# Altium PCB PCB1.PcbDoc
Units mm, origin at the board's own origin, x right, y up, seen from the top; angles counter-clockwise.
Board outline 48.64 x 53.21 mm, 2 copper layers (Top Layer, Bottom Layer); 29 components, 0 nets, 122 pads, 0 vias.
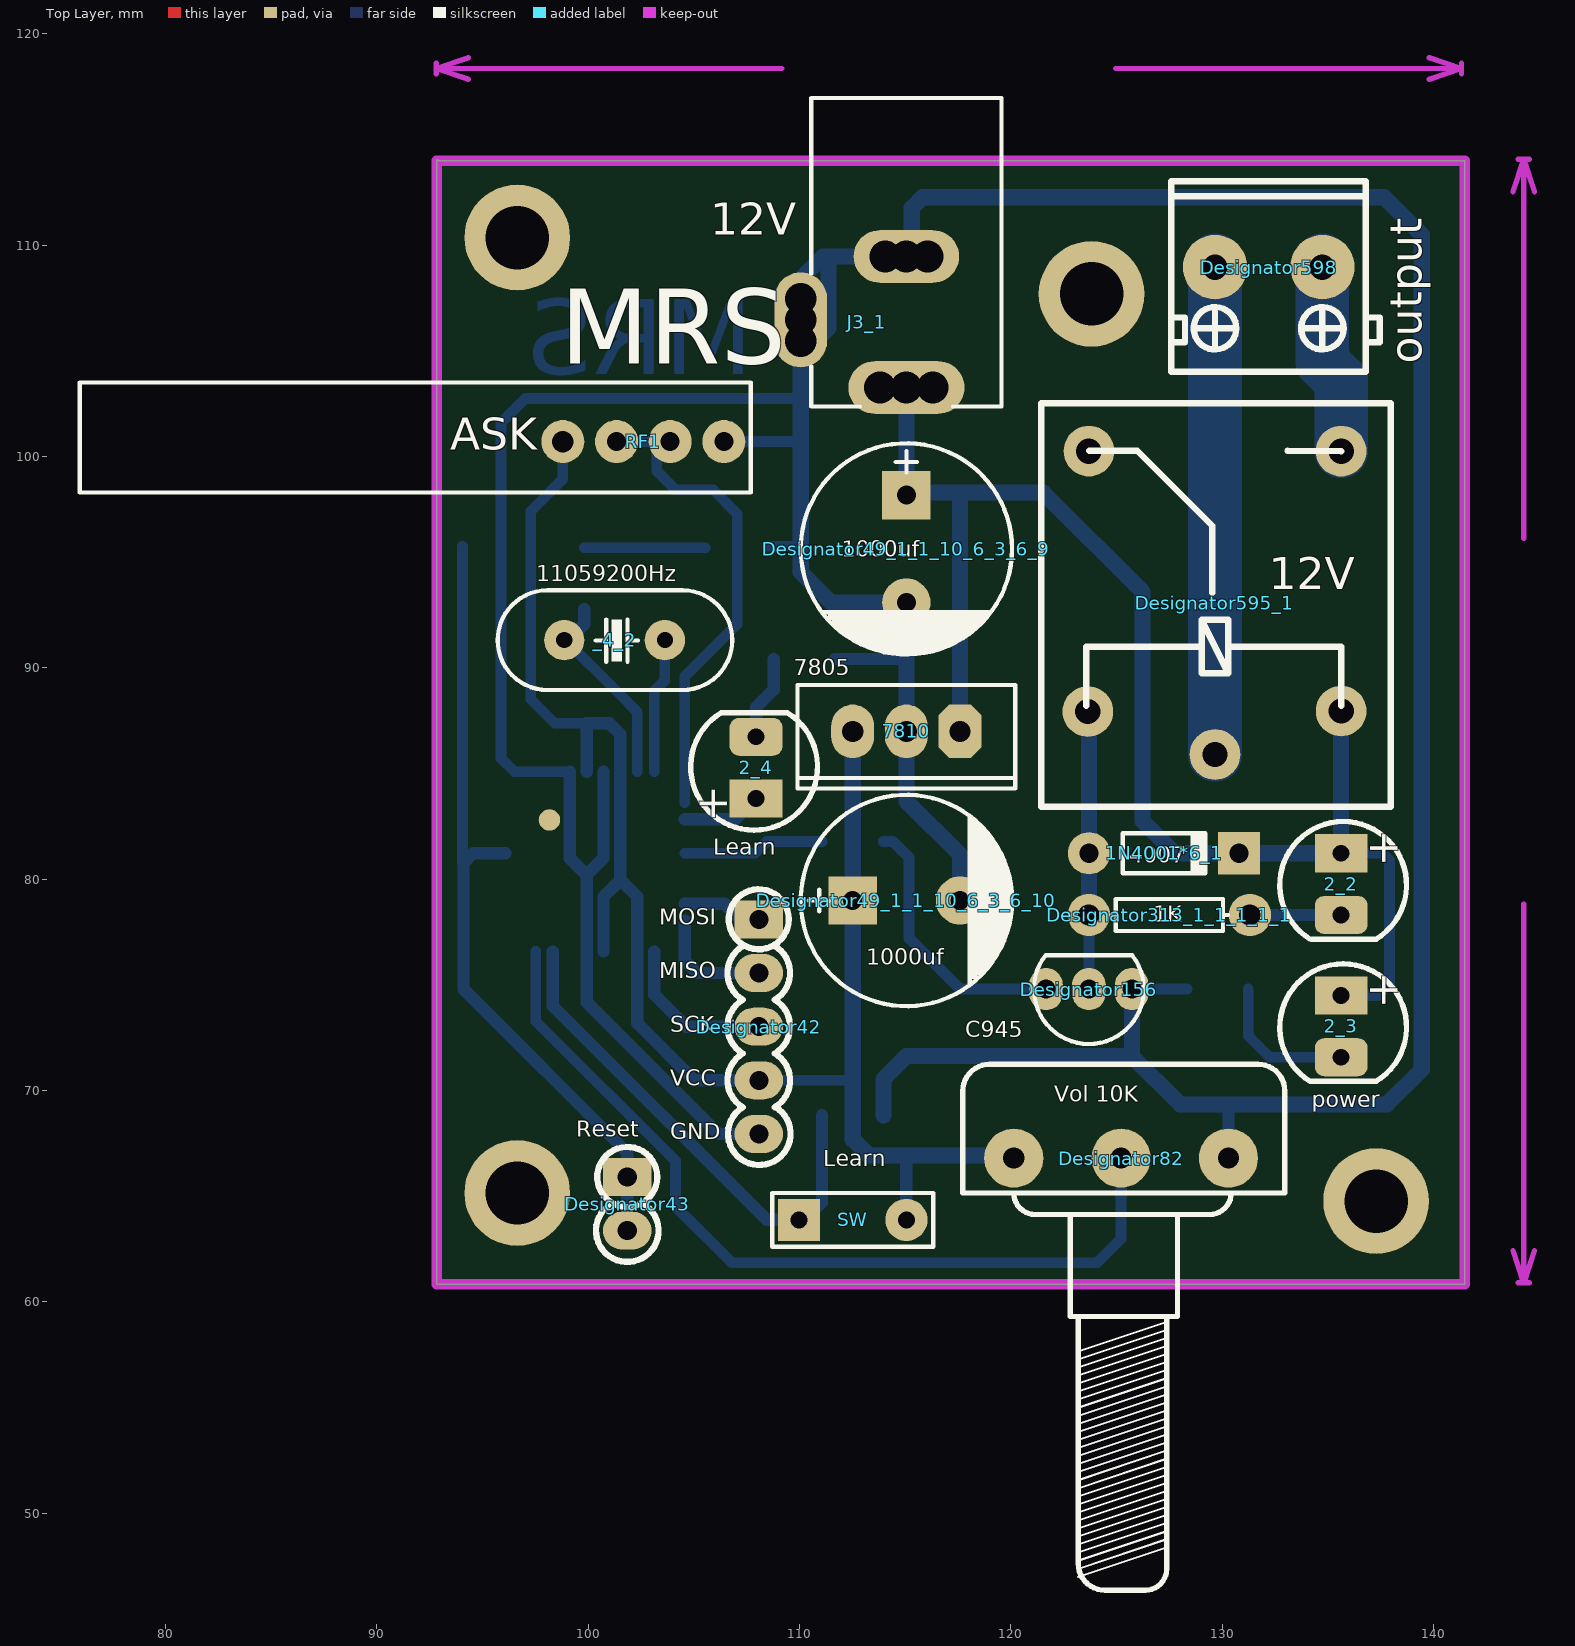
[diagram p0: Top Layer view]
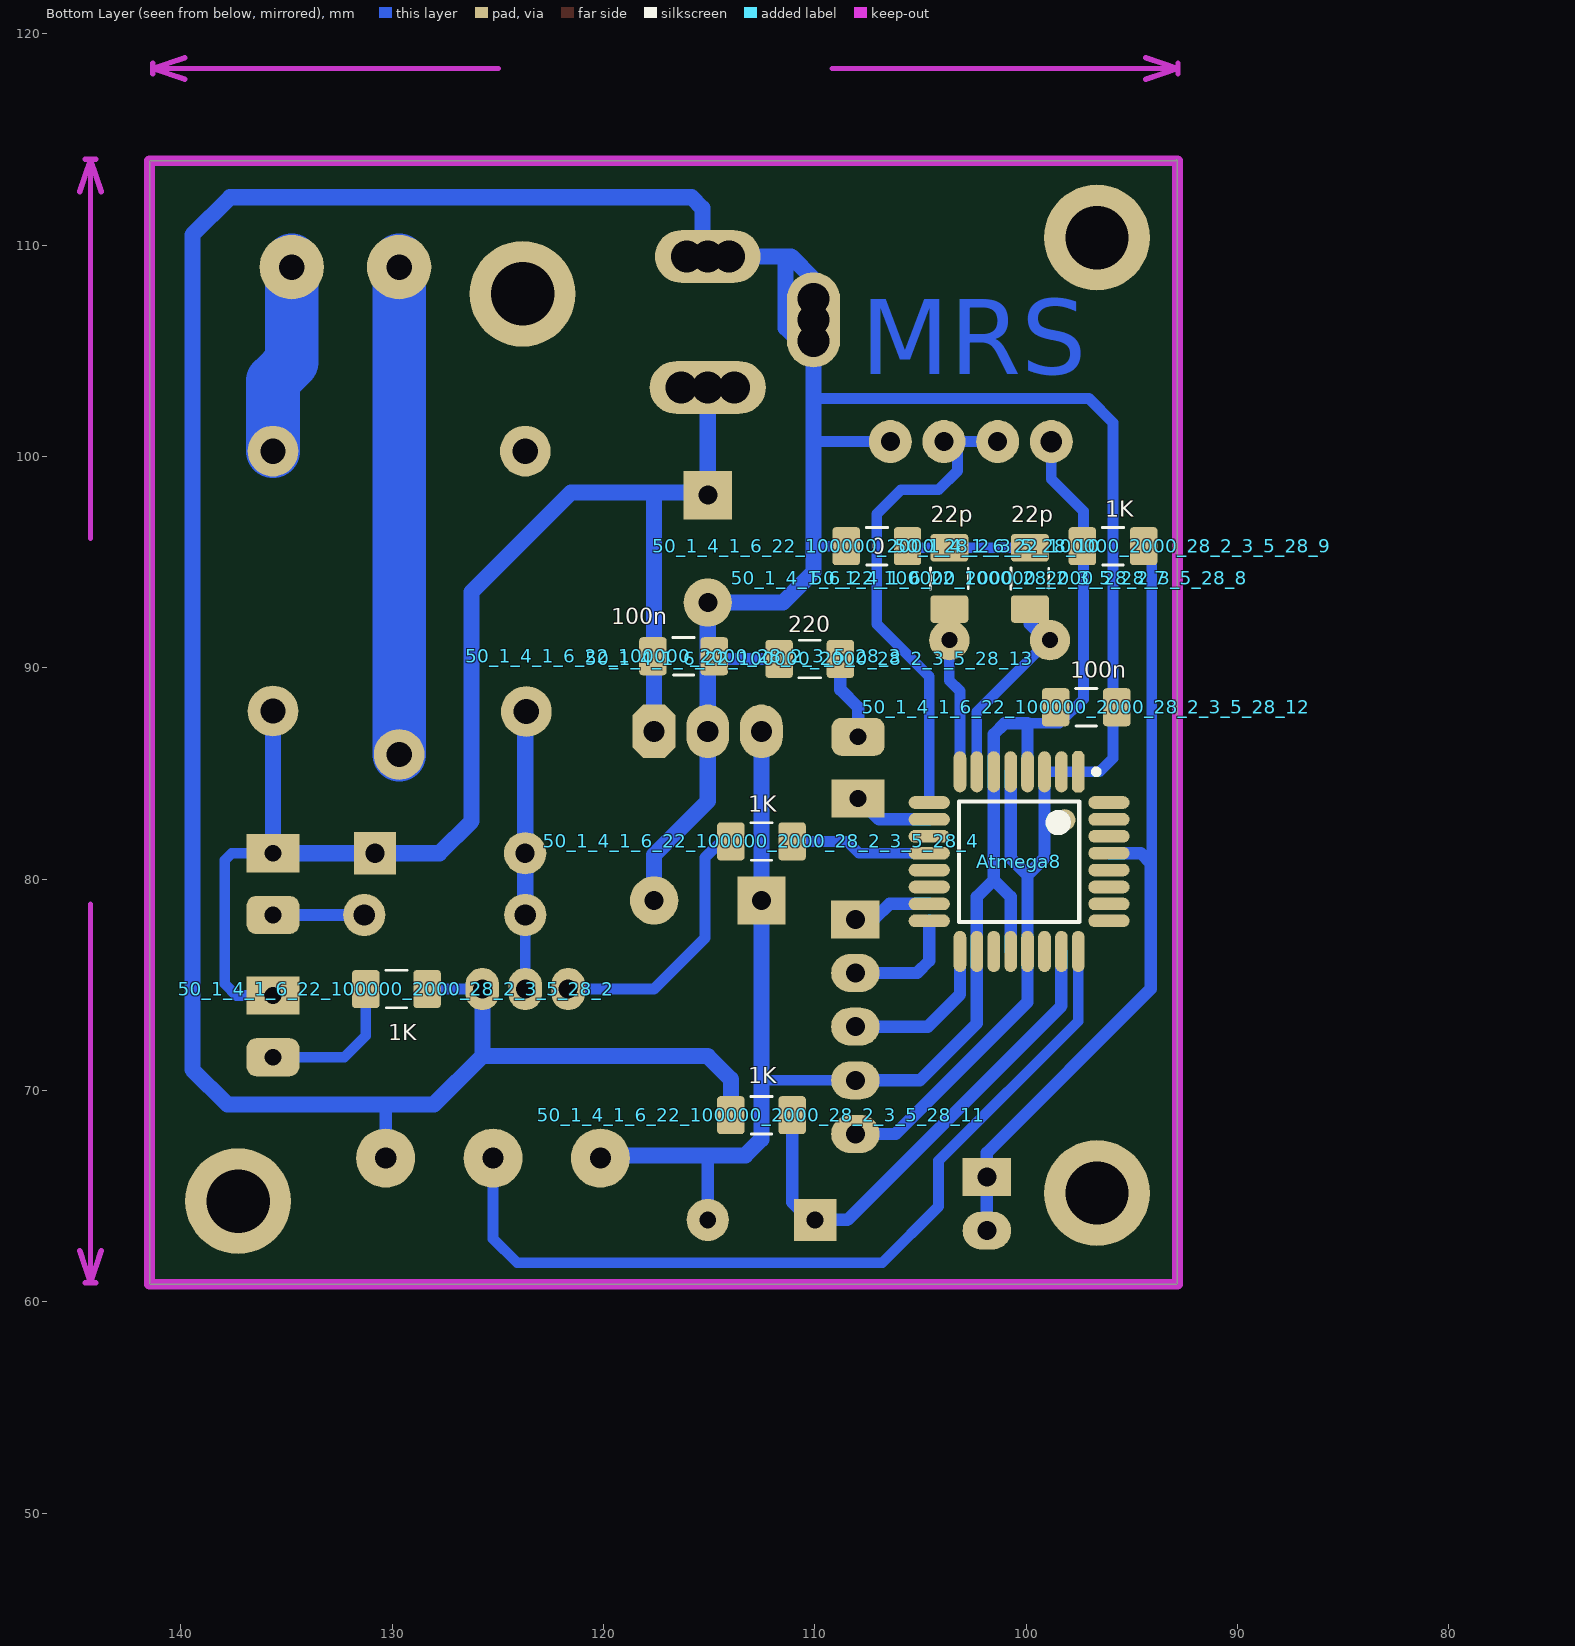
[diagram p1: Bottom Layer view, seen from below]

## Layer stack, top to bottom
Top Layer: signal copper 0.0356
Dielectric: dielectric 0.32, FR-4, Dk 4.8
Bottom Layer: signal copper 0.0356

## Board outline
92.837,113.995 92.888,114.046 92.939,113.995 141.478,113.995 141.478,60.833 92.837,60.833

## Design rules (kind name [scope] priority, off if disabled: settings)
Clearance [All] p1: gap=0.254
ComponentClearance [All] p1: gap=0.254 collisioncheckmode=3 verticalgap=0.254
PolygonConnect [All] p1: connectstyle=Relief reliefconductorwidth=0.254 reliefentries=4 polygonreliefangle="90 Angle"
RoutingVias [All] p1: holewidth=0.711 width=1.27 viastyle="Through Hole" minholewidth=0.711 minwidth=1.27 maxholewidth=0.711 maxwidth=1.27
SolderMaskExpansion [All] p1: expansion=0.102
TestPointUsage [All] p1: valid=0 allowmultiple=FALSE
Testpoint [All] p1: side=15 testpointundercomponent=TRUE minsize=1.016 maxsize=2.54 preferedsize=1.524 minholesize=0 maxholesize=1.016 preferedholesize=0.813 testpointgrid=0.025 style=1023 order=0-112345678
Width [All] p1: maxlimit=0.254 minlimit=0.254 preferedwidth=0.254
18 further rules are at their usual default settings.

## Components (designator, comment, footprint, x,y, rotation, side; value= is the part's Value field where it differs from the comment)
1N4001*6_1 "Comment" DIO7.1-3.9x1.9 127.254,81.229 r0 top
2_2 "Comment" LED-1 135.636,79.832 r0 top
2_3 "Comment" LED-1 135.636,73.101 r0 top
2_4 "Comment" LED-1 107.95,85.217 r180 top
50_1_4_1_6_22_100000_2000_28_2_3_5_28_2 "Comment" RESC3216X70N 129.794,74.803 r0 bottom
50_1_4_1_6_22_100000_2000_28_2_3_5_28_3 "Comment" RESC3216X70N 116.205,90.551 r0 bottom
50_1_4_1_6_22_100000_2000_28_2_3_5_28_4 "Comment" RESC3216X70N 112.522,81.788 r0 bottom
50_1_4_1_6_22_100000_2000_28_2_3_5_28_7 "Comment" RESC3216X70N 103.632,94.234 r270 bottom
50_1_4_1_6_22_100000_2000_28_2_3_5_28_8 "Comment" RESC3216X70N 99.822,94.234 r270 bottom
50_1_4_1_6_22_100000_2000_28_2_3_5_28_9 "Comment" RESC3216X70N 95.885,95.758 r0 bottom
50_1_4_1_6_22_100000_2000_28_2_3_5_28_10 "Comment" RESC3216X70N 107.061,95.758 r0 bottom
50_1_4_1_6_22_100000_2000_28_2_3_5_28_11 "Comment" RESC3216X70N 112.522,68.834 r0 bottom
50_1_4_1_6_22_100000_2000_28_2_3_5_28_12 "Comment" RESC3216X70N 97.155,88.138 r0 bottom
50_1_4_1_6_22_100000_2000_28_2_3_5_28_13 "Comment" RESC3216X70N 110.236,90.424 r180 bottom
7810 "Comment" 221A-04 115.062,86.995 r180 top
_4_2 "Comment" XTAL 103.632,91.313 r180 top
Atmega8 "Comment" My_32A_M 100.33,80.832 r270 bottom
Designator42 "Comment" SIP5 108.077,78.105 r270 top
Designator43 "Comment" SIP2 101.854,65.913 r270 top
Designator49_1_1_10_6_3_6_9 "Comment" "cap 04" 115.062,95.631 r90 top
Designator49_1_1_10_6_3_6_10 "Comment" "cap 04" 115.062,78.994 r180 top
Designator82 "Comment" VOLOM 125.476,66.802 r180 top
Designator156 "Comment" 78LXX 123.698,74.803 r0 top
Designator313_1_1_1_1_1 "Comment" AXIAL-0.3 127.508,78.308 r0 top
Designator595_1 "Comment" RELAY3 135.636,87.96 r180 top
Designator598 "Comment" TER2 134.747,108.966 r0 top
J3_1 "Adaptor jack" KLD-0202 115.062,116.967 r270 top
RF1 "Comment" HDR1X4 98.806,100.711 r0 top
SW "Comment" HDR1X3 109.982,63.881 r0 top

## Footprints (in the part's own frame and the unit in brackets; to place one, negate y for a bottom-side part, rotate by r counter-clockwise, add the part's x,y. Pads: shape width x height; smd on the part's side, far side on the other; paste and mask are expansions set on the pad)
78LXX [mm]
  oval 1.6x2 hole 0.9: B(-2.032,0) C(0,0) E(2.032,0)
  silkscreen extent -2.6,-2.6 2.6,1.6, body extent -2.48,-2.3 2.32,1.63, height 8
221A-04 [mm]
  oct 2.032x2.54 hole 1: 1(-2.54,0)
  oval 2.032x2.54 hole 1: 2(0,0) 3(2.54,0)
  silkscreen extent -5.15,-2.2 5.15,2.7
AXIAL-0.3 [mm]
  round 2 hole 1.016: 1(-3.81,0) 2(3.81,0)
  silkscreen extent -2.77,-0.76 2.77,0.76
"cap 04" [mil]
  rect 90x90 hole 35.43: 1(100,0)
  round 90 hole 35.43: 2(-100,0)
  silkscreen extent -197,-197 197,197, body extent -198,-197 198,199, height 513
DIO7.1-3.9x1.9 [mm]
  round 2 hole 0.9: 1(-3.55,0)
  rect 2x2 hole 0.9: 2(3.55,0)
  silkscreen extent -1.95,-0.95 2.05,0.95
HDR1X3 [mm]
  round 0 all layers, no hole: 2(2.54,0)
  round 2 hole 0.8: +(5.08,0)
  rect 2x2 hole 0.8: -(0,0)
  silkscreen extent -1.27,-1.27 6.35,1.27
HDR1X4 [mil] "Connector; Header; 4 Position"
  round 80 hole 35.43: 2(100,0) -(300,0) ""(200,0)
  round 80 hole 40: +(0,0)
  silkscreen extent -900,-95 350,110
KLD-0202 [mm]
  rect 2.5x2.5 hole 1.5: 1(13.7,0) 2(7.5,0) 3(10.5,-5)
  oval 2.5x3 hole 1.5: 1A(13.7,-1.25) 1B(13.7,1.25) 2A(7.5,-1) 2B(7.5,1)
  round 2.5 hole 1.5: 3A(9.5,-5) 3B(11.5,-5)
  silkscreen extent 0,-4.5 14.6,4.5
LED-1 [mm] "LED; 2 Leads"
  rect 2.5x1.8 hole 0.8: 1(0,1.397)
  rrect50% 2.5x1.8 hole 0.8: 2(0,-1.524)
  silkscreen extent -2.91,-2.67 3.09,2.9
My_32A_M [mm]
  oct 1.95x0.6 smd: 1(-4.25,2.8)
  oval 0.6x1.95 smd: 10(-2,-4.25) 13(0.4,-4.25) 14(1.2,-4.25) 25(2.8,4.25) 26(2,4.25) 27(1.2,4.25) 32(-2.8,4.25) B0(-0.4,-4.25) C5(0.4,4.25) D5(-2.8,-4.25) D7(-1.2,-4.25) MISO(2.8,-4.25) MOSI(2,-4.25) RESET(-0.4,4.25) RX(-1.2,4.25) TX(-2,4.25)
  oval 1.95x0.6 smd: 19(4.25,-1.2) 22(4.25,1.2) 24(4.25,2.8) AREF(4.25,-0.4) AVCC(4.25,-2) B5/SCK(4.25,-2.8) C0(4.25,2) D4(-4.25,2) GND(-4.25,-0.4) GND(-4.25,1.2) GND(4.25,0.4) VCC(-4.25,-1.2) VCC(-4.25,0.4) XTAL(-4.25,-2.8) XTAL(-4.25,-2)
  silkscreen extent -4.37,-2.85 2.85,3.77, body extent -3.5,-3.5 3.5,3.5, height 1.2
RELAY3 [mm]
  round 2.4 hole 1.2: 1(0,0) 2(11.989,0.025) 3(5.969,2.057) 4(11.938,-12.294) 5(0,-12.294)
  silkscreen extent -2.34,-14.55 14.2,4.52
RESC3216X70N [mm] "Chip Resistor, Body 3.2x1.6mm, EIA 1206, IPC Medium Density"
  round 0.508 on Mech15: 0(0,0)
  rrect25% 1.3x1.8 smd: 1(-1.45,0) 2(1.45,0)
  silkscreen extent -0.51,-0.89 0.51,0.89, body extent -1.62,-0.82 1.63,0.83, height 0.69
SIP2 [mm]
  rect 1.8x2.3 hole 0.9: 1(0,0)
  oval 1.8x2.3 hole 0.9: 2(2.54,0)
  silkscreen extent -1.42,-1.48 4.02,1.48
SIP5 [mm]
  rect 1.8x2.3 hole 0.9: 1(0,0)
  oval 1.8x2.3 hole 0.9: 2(2.54,0) 3(5.08,0) 4(7.62,0) 5(10.16,0)
  silkscreen extent -1.42,-1.48 11.62,1.5
TER2 [mil]
  round 120 hole 47.24: 1(0,0) 2(-200,0)
  silkscreen extent -282,-195 107,160
VOLOM [mil]
  round 110 hole 39.37: 0(-190,0) 1(10,0) 2(210,0)
  silkscreen extent -295,-175 305,805
XTAL [mil]
  round 75 hole 30: 1(0,0) 2(187.4,0)
  silkscreen extent -126,-93 311,93, body extent -131,-94 316,95, height 514

## Part data
7810: library part MC7805BT
RF1: library part COAX-M
SW: library part "Header 3"

## Free pads (board coordinates)
  round 5 hole 3: 0(96.647,65.151) 0(96.647,110.363) 0(123.825,107.696) 0(137.287,64.77)
  round 1.016 all layers, no hole: 0(98.171,82.804)

## Nets (pads, with @x,y where several pads share a name; then routed paths per layer and width w, separated by ;. In a path a pad name is that pad's centre, name@x,y a point inside that pad or via, vN(x,y) a via of type N, cw(c..) or ccw(c..) an arc to the next point about the centre after c; other vN are vias at no path point)
pads on no net: 1N4001*6_1.1 1N4001*6_1.2 2_2.1 2_2.2 2_3.1 2_3.2 2_4.1 2_4.2 50_1_4_1_6_22_100000_2000_28_2_3_5_28_2.0 50_1_4_1_6_22_100000_2000_28_2_3_5_28_2.1 50_1_4_1_6_22_100000_2000_28_2_3_5_28_2.2 50_1_4_1_6_22_100000_2000_28_2_3_5_28_3.0 50_1_4_1_6_22_100000_2000_28_2_3_5_28_3.1 50_1_4_1_6_22_100000_2000_28_2_3_5_28_3.2 50_1_4_1_6_22_100000_2000_28_2_3_5_28_4.0 50_1_4_1_6_22_100000_2000_28_2_3_5_28_4.1 50_1_4_1_6_22_100000_2000_28_2_3_5_28_4.2 50_1_4_1_6_22_100000_2000_28_2_3_5_28_7.0 50_1_4_1_6_22_100000_2000_28_2_3_5_28_7.1 50_1_4_1_6_22_100000_2000_28_2_3_5_28_7.2 50_1_4_1_6_22_100000_2000_28_2_3_5_28_8.0 50_1_4_1_6_22_100000_2000_28_2_3_5_28_8.1 50_1_4_1_6_22_100000_2000_28_2_3_5_28_8.2 50_1_4_1_6_22_100000_2000_28_2_3_5_28_9.0 50_1_4_1_6_22_100000_2000_28_2_3_5_28_9.1 50_1_4_1_6_22_100000_2000_28_2_3_5_28_9.2 50_1_4_1_6_22_100000_2000_28_2_3_5_28_10.0 50_1_4_1_6_22_100000_2000_28_2_3_5_28_10.1 50_1_4_1_6_22_100000_2000_28_2_3_5_28_10.2 50_1_4_1_6_22_100000_2000_28_2_3_5_28_11.0 50_1_4_1_6_22_100000_2000_28_2_3_5_28_11.1 50_1_4_1_6_22_100000_2000_28_2_3_5_28_11.2 50_1_4_1_6_22_100000_2000_28_2_3_5_28_12.0 50_1_4_1_6_22_100000_2000_28_2_3_5_28_12.1 50_1_4_1_6_22_100000_2000_28_2_3_5_28_12.2 50_1_4_1_6_22_100000_2000_28_2_3_5_28_13.0 50_1_4_1_6_22_100000_2000_28_2_3_5_28_13.1 50_1_4_1_6_22_100000_2000_28_2_3_5_28_13.2 7810.1 7810.2 7810.3 _4_2.1 _4_2.2 Atmega8.1 Atmega8.10 Atmega8.13 Atmega8.14 Atmega8.19 Atmega8.22 Atmega8.24 Atmega8.25 Atmega8.26 Atmega8.27 Atmega8.32 Atmega8.AREF Atmega8.AVCC Atmega8.B0 Atmega8.B5/SCK Atmega8.C0 Atmega8.C5 Atmega8.D4 Atmega8.D5 Atmega8.D7 Atmega8.GND Atmega8.MISO Atmega8.MOSI Atmega8.RESET Atmega8.RX Atmega8.TX Atmega8.VCC Atmega8.XTAL Designator42.1 Designator42.2 Designator42.3 Designator42.4 Designator42.5 Designator43.1 Designator43.2 Designator49_1_1_10_6_3_6_9.1 Designator49_1_1_10_6_3_6_9.2 Designator49_1_1_10_6_3_6_10.1 Designator49_1_1_10_6_3_6_10.2 Designator82.0 Designator82.1 Designator82.2 Designator156.B Designator156.C Designator156.E Designator313_1_1_1_1_1.1 Designator313_1_1_1_1_1.2 Designator595_1.1 Designator595_1.2 Designator595_1.3 Designator595_1.4 Designator595_1.5 Designator598.1 Designator598.2 J3_1.1 J3_1.1A J3_1.1B J3_1.2 J3_1.2A J3_1.2B J3_1.3 J3_1.3A J3_1.3B RF1. RF1.2 RF1.+ RF1.- SW.2 SW.+ SW.-
copper on no net: | length 617.8
  Bottom Layer w0.508: 94.054,80.772 94.054,95.758 ; 97.53,76.582 97.53,73.285 104.14,66.675 104.14,64.516 106.807,61.849 124.079,61.849 125.222,62.992 125.222,66.802 ; 98.806,100.711 98.806,98.933 97.282,97.409 97.282,88.519 98.425,87.376 100.457,87.376 ; 98.872,91.313 98.933,91.313 101.473,88.773 102.33,87.916 102.33,85.082 ; 99.13,85.082 96.528,85.082 95.885,85.725 95.885,101.6 97.028,102.743 110.062,102.743 ; 99.822,95.684 103.632,95.684 105.537,95.684 ; 101.981,100.711 104.394,100.711 ; 103.13,85.082 103.13,88.906 103.632,89.408 103.632,91.313 ; 103.251,100.711 103.251,99.314 104.14,98.425 105.918,98.425 107.061,97.282 107.061,92.075 104.58,89.594 104.58,83.632 ; 104.58,81.232 107.902,81.232 108.458,81.788 111.072,81.788 ; 107.061,100.711 110.062,100.711 ; 107.442,70.485 112.522,70.485 ; 108.511,95.758 110.062,95.758 ; 113.972,81.788 114.427,81.788 115.189,81.026 115.189,77.216 117.602,74.803 121.666,74.803 ; 123.698,74.803 123.698,78.308 ; 125.73,74.803 128.344,74.803 ; 131.244,74.803 131.244,72.591 132.258,71.577 135.636,71.577 ; 135.636,74.498 137.363,74.498 137.922,75.057 137.922,80.899 137.592,81.229 135.636,81.229
  Bottom Layer w0.584: 96.08,81.232 94.567,81.232 94.107,80.772 94.107,74.803 101.854,67.056 101.854,63.373 ; 98.33,76.582 98.33,74.009 108.458,63.881 110.236,63.881 111.072,64.717 111.072,68.834 ; 99.06,91.313 99.822,92.075 99.822,92.784 ; 99.13,85.082 99.13,80.996 99.93,80.196 ; 99.93,85.082 99.93,87.376 100.457,87.376 101.016,87.376 101.53,86.862 101.53,85.082 101.53,79.971 ; 100.73,76.582 100.73,79.171 101.53,79.971 ; 100.73,85.082 100.73,80.996 99.93,80.196 ; 103.13,76.582 103.13,74.543 104.648,73.025 108.077,73.025 ; 104.58,78.032 104.58,76.141 105.156,75.565 108.077,75.565 ; 104.58,78.832 106.461,78.832 107.188,78.105 108.077,78.105 ; 104.58,82.832 106.962,82.832 107.95,83.82 ; 107.95,86.741 107.95,88.138 108.786,88.974 108.786,90.424 ; 108.077,67.945 106.172,67.945 99.93,74.187 99.93,76.582 99.93,80.196 ; 108.077,70.485 105.029,70.485 102.33,73.184 102.33,76.582 102.33,79.171 101.53,79.971 ; 111.686,90.424 114.755,90.424 ; 115.062,63.881 115.062,66.929 ; 130.302,66.802 130.302,69.342 ; 131.191,78.308 135.636,78.308
  Bottom Layer w0.762: 110.062,104.775 111.379,106.092 111.379,109.467 ; 112.522,78.994 112.522,67.691 113.284,66.929 120.142,66.929 ; 112.522,79.248 112.522,86.995 ; 113.972,68.834 113.972,70.538 115.062,71.628 121.666,71.628 125.73,71.628 ; 115.062,99.314 115.062,98.679 115.062,99.695 ; 115.062,103.267 115.062,99.695 ; 115.062,109.467 111.118,109.467 110.062,108.411 110.062,94.535 111.506,93.091 115.062,93.091 115.062,86.995 115.062,83.693 117.602,81.153 117.602,78.994 ; 115.316,109.474 115.316,111.76 115.824,112.268 137.668,112.268 139.446,110.49 139.446,70.993 137.795,69.342 128.016,69.342 125.73,71.628 ; 117.602,86.995 117.602,98.298 ; 123.698,78.308 123.698,87.884 ; 125.73,74.803 125.73,71.628 ; 135.636,87.96 135.636,81.229 127.762,81.229 126.238,82.753 126.238,93.599 121.539,98.298 115.062,98.298 115.062,99.695
  Bottom Layer w2.54: 129.667,85.903 129.667,109.296 ; 134.747,109.296 134.747,104.47 135.636,103.581 135.636,100.254

## Keep-outs
Keep-Out Layer:
  lines w0.254: 92.814,118.11 92.814,118.618 ; 94.338,117.856 92.814,118.364 ; 94.338,118.872 92.814,118.364 ; 109.174,118.364 92.814,118.364 ; 124.968,118.364 141.328,118.364 ; 139.804,117.856 141.328,118.364 ; 139.804,118.872 141.328,118.364 ; 141.328,118.11 141.328,118.618 ; 143.764,62.423 144.272,60.899 ; 143.764,112.537 144.272,114.061 ; 144.018,60.899 144.526,60.899 ; 144.018,114.061 144.526,114.061 ; 144.272,78.821 144.272,60.899 ; 144.272,96.139 144.272,114.061 ; 144.78,62.423 144.272,60.899 ; 144.78,112.537 144.272,114.061
  lines w0.508: 92.837,60.833 141.478,60.833 141.478,113.995 92.837,113.995 92.837,60.833
  text "48.514 (mm)" at 109.428,117.45 h1.52
  text "53.1622 (mm)" at 145.186,79.075 h1.52 r90

## Other copper
Bottom Layer:
  text "MRS" at 107.823,103.886 h3.56

## Silkscreen, mask and mechanical layers (free items; w line width, h text height)
Top Overlay:
  text "12V" at 105.791,110.49 h1.52
  text "MRS" at 98.679,104.394 h3.56
  text "output" at 139.446,104.394 h1.52 r90
  text "ASK" at 93.472,100.33 h1.52
  text "1000uf" at 112.014,95.25 h0.76
  text "11059200Hz" at 97.536,94.107 h0.76
  text "12V" at 132.207,93.726 h1.52
  text "7805" at 109.728,89.662 h0.76
  text "Learn" at 105.918,81.153 h0.76
  text "4007" at 125.603,80.772 h0.76
  text "1K" at 126.746,77.978 h0.76
  text "MOSI" at 103.378,77.851 h0.76
  text "1000uf" at 113.157,75.946 h0.76
  text "MISO" at 103.378,75.311 h0.76
  text "SCK" at 103.886,72.771 h0.76
  text "C945" at 117.856,72.517 h0.76
  text "VCC" at 103.886,70.231 h0.76
  text "Vol 10K" at 122.047,69.469 h0.76
  text "power" at 134.239,69.215 h0.76
  text "Reset" at 99.441,67.818 h0.76
  text "GND" at 103.886,67.691 h0.76
  text "Learn" at 111.125,66.421 h0.76
Bottom Overlay:
  text "1K" at 96.266,97.155 h0.76
  text "22p" at 100.711,96.901 h0.76
  text "22p" at 104.521,96.901 h0.76
  text "0" at 107.315,95.377 h0.76
  text "100n" at 119.634,92.075 h0.76
  text "220" at 111.252,91.694 h0.76
  text "100n" at 97.917,89.535 h0.76
  text "1K" at 113.157,83.185 h0.76
  text "1K" at 130.175,72.39 h0.76
  text "1K" at 113.157,70.358 h0.76

## Text inside footprints (layer, text, board x,y; h text height)
2_2: Top Overlay "+" at 138.303,80.594 h1.52 r90
2_3: Top Overlay "+" at 138.303,73.863 h1.52 r90
2_4: Top Overlay "+" at 105.283,84.455 h1.52 r270